# EAGLE board magnetolocator2 (EAGLE 9.5.2)
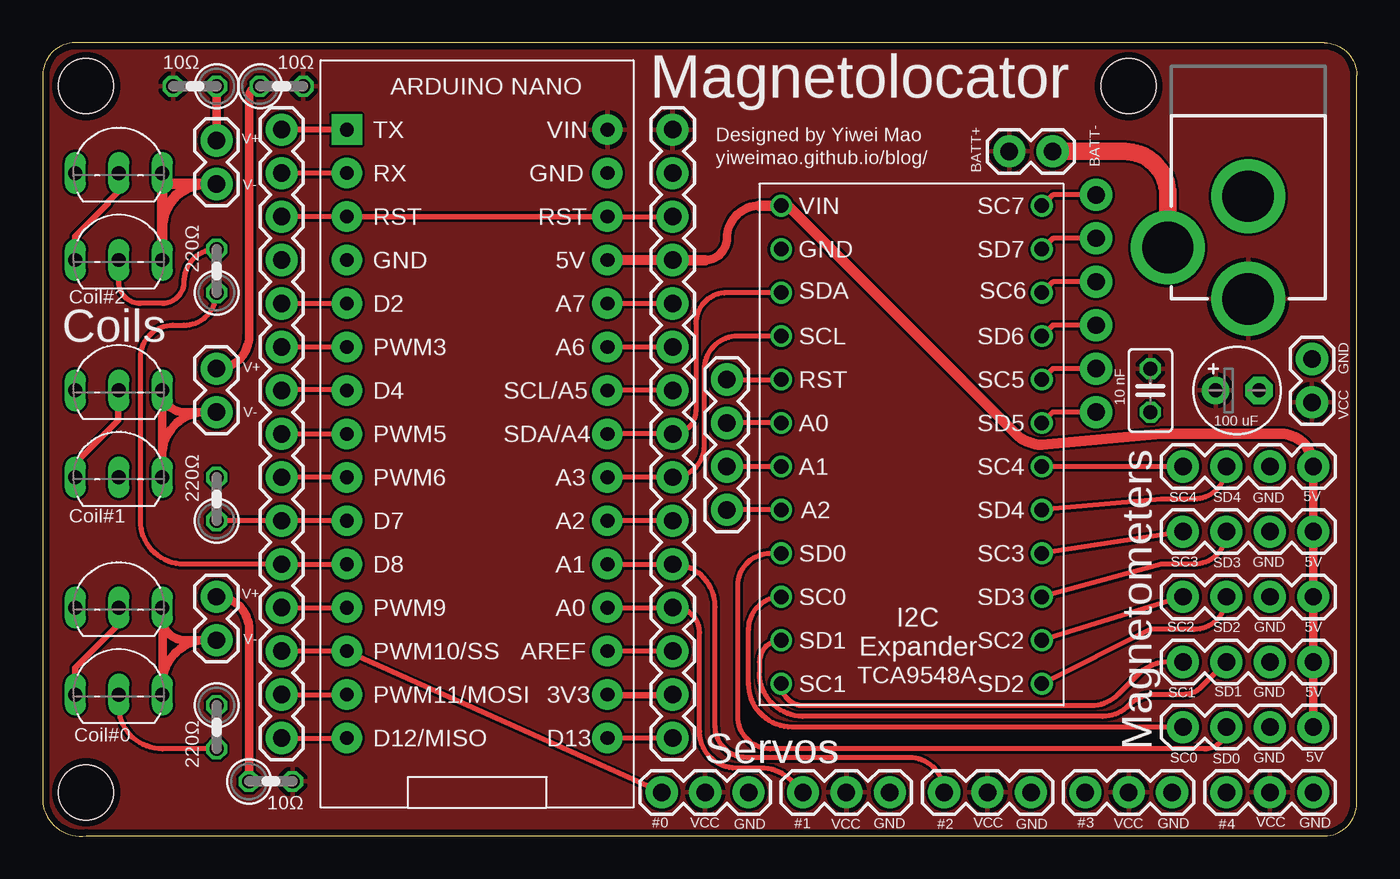
[diagram p0: board, top side]
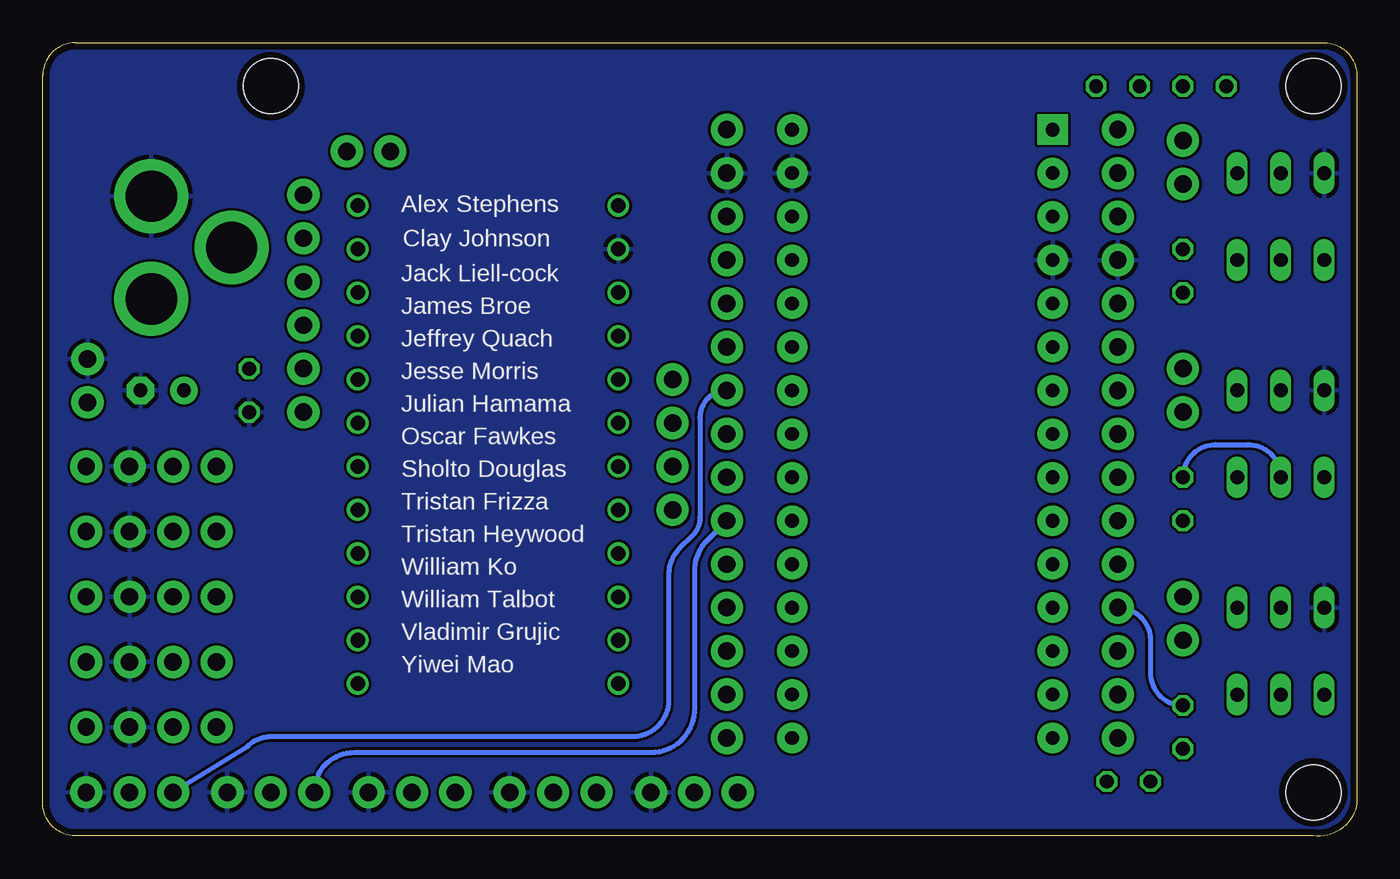
[diagram p1: board, bottom side, seen from below]

Size 76.83 x 46.38 mm. Coordinates in mm from the lower left corner, seen from the top.
Outline: 2.54,0.02 74.93,0.02 arc90 76.83,1.93 76.83,44.47 arc90 74.93,46.38 1.91,46.38 arc90 0,44.47 0,1.93 arc90 2.54,0.02
Copper layers (1*16): Top 0.035559375mm / dielectric 1.6mm / Bottom 0.035559375mm
Design rules "oshpark-2layer": minimum track width 6mil, minimum drill 10mil, track to track 6mil, track to pad 6mil, pad to pad 6mil, via to via 6mil, smd to smd 6mil, copper to edge 15mil, drill to drill 6mil, minimum pad ring 5mil, minimum via ring 5mil, stop-mask expansion 2.5mil, vias tented up to drill 0mil, thermal gap 10mil
Net classes: 1 coils: width 0.508 mm; 2 power: width 0.508 mm; 3 darlington: width 0.381 mm
Holes 3.2 mm at 2.54,2.56 63.5,43.84 2.54,43.84

## Footprints (pad centres in the part's own frame; a part is rotated, then mirrored left to right if it is on the bottom)
C025-025X050 = drill 0.813 octagon: 1 -1.27,0; 2 1.27,0
E2,5-5 = drill 0.813 pad 1.6: + -1.27,0 | drill 0.813 pad 1.6 octagon: - 1.27,0
1X04 = drill 1.016 pad 1.88: 1 0,0; 2 2.54,0; 3 5.08,0; 4 7.62,0
1X02 = drill 1.016 pad 1.88: 1 0,0; 2 2.54,0
POWER_JACK_PTH = drill 2.997 pad 4.318: GND 0,7.7; GNDBREAK 4.7,10.7; PWR 0,13.7
1X15 = drill 1.016 pad 1.88: 1 0,0; 2 2.54,0; 3 5.08,0; 4 7.62,0; 5 10.16,0; 6 12.7,0; 7 15.24,0; 8 17.78,0; 9 20.32,0; 10 22.86,0; 11 25.4,0; 12 27.94,0; 13 30.48,0; 14 33.02,0; 15 35.56,0
1X03 = drill 1.016 pad 1.88: 1 0,0; 2 2.54,0; 3 5.08,0
1X06_NO_SILK = drill 1.016 pad 1.88: 1 0,0; 2 2.54,0; 3 5.08,0; 4 7.62,0; 5 10.16,0; 6 12.7,0
0207/2V = drill 0.813 octagon: 1 -1.27,0; 2 1.27,0
TO92-EBC = drill 0.813 long: B 0,-1.27; C 2.54,-1.27; E -2.54,-1.27
BOARD_ARDUINO_NANO = drill 0.8 pad 1.778: 3V3 15.24,2.54; +5V 15.24,27.94; A0 15.24,7.62; A1 15.24,10.16; A2 15.24,12.7; A3 15.24,15.24; A4 15.24,17.78; A5 15.24,20.32; A6 15.24,22.86; A7 15.24,25.4; AREF 15.24,5.08; D0/RX 0,33.02; D2 0,25.4; D3 0,22.86; D4 0,20.32; D5 0,17.78; D6 0,15.24; D7 0,12.7; D8 0,10.16; D9 0,7.62; D10 0,5.08; D11 0,2.54; D12 0,0; D13 15.24,0; GND 0,27.94; GND1 15.24,33.02; RESET 0,30.48; RESET1 15.24,30.48; VIN 15.24,35.56 | drill 0.8 pad 1.778 square: D1/TX 0,35.56
TCA9548A = drill 0.85: GND 1.27,26.67; RST 1.27,19.05; S0 1.27,16.51; S1 1.27,13.97; S2 1.27,11.43; SCL 1.27,21.59; SCL0 1.27,6.35; SCL1 1.27,1.27; SCL2 16.51,3.81; SCL3 16.51,8.89; SCL4 16.51,13.97; SCL5 16.51,19.05; SCL6 16.51,24.13; SCL7 16.51,29.21; SDA 1.27,24.13; SDA0 1.27,8.89; SDA1 1.27,3.81; SDA2 16.51,1.27; SDA3 16.51,6.35; SDA4 16.51,11.43; SDA5 16.51,16.51; SDA6 16.51,21.59; SDA7 16.51,26.67; VIN 1.27,29.21

## Placement (x,y rotation side)
C1  [C025-025X050]  64.77,26.06 270 top
C2  [E2,5-5]  69.85,26.06 0 top
J1  [1X04]  66.67,13.99 0 top
J2  [1X04]  66.67,17.8 0 top
J3  [1X04]  66.67,21.61 0 top
J4  [1X04]  66.67,10.18 0 top
J5  [1X04]  66.67,6.37 0 top
J6  [1X02]  10.16,40.66 270 top
J7  [1X02]  10.16,13.99 270 top
J8  [1X02]  10.16,27.33 270 top
J9  [1X04]  40.01,19.07 90 top
J10  POWER_JACK  [POWER_JACK_PTH]  70.48,45.11 180 top
J11  [1X15]  13.97,41.3 270 top
J12  [1X15]  36.83,41.3 270 top
J13  servo0  [1X03]  74.3,2.56 180 top
J14  servo1  [1X03]  66.04,2.56 180 top
J15  servo2  [1X03]  57.78,2.56 180 top
J16  servo3  [1X03]  49.53,2.56 180 top
J17  servo4  [1X03]  41.27,2.56 180 top
J18  [1X02]  56.52,40.03 0 top
J19  [1X02]  74.22,27.89 270 top
J20  [1X06_NO_SILK]  61.59,37.49 270 top
R1  [0207/2V]  10.16,33.04 90 top
R2  [0207/2V]  10.16,19.71 90 top
R3  [0207/2V]  13.97,43.84 0 top
R4  [0207/2V]  8.89,43.84 180 top
R5  [0207/2V]  10.16,6.37 270 top
R6  [0207/2V]  13.34,3.2 0 top
T1  [TO92-EBC]  4.45,22.25 0 top
T2  [TO92-EBC]  4.45,40.03 0 top
T3  [TO92-EBC]  4.45,34.95 0 top
T4  [TO92-EBC]  4.45,27.33 0 top
T5  [TO92-EBC]  4.45,14.63 0 top
T6  [TO92-EBC]  4.45,9.55 0 top
U$1  BOARD_ARDUINO-NANO  [BOARD_ARDUINO_NANO]  17.78,5.74 0 top
U$2  TCA9548A  [TCA9548A]  41.91,7.64 0 top

## Library data of the parts
C1 C2 = rcl; SPICEPREFIX: C
J1-J5 J9 = SparkFun-Connectors; PROD_ID: CONN-09696
J6-J8 J11 J12 J18 J19 = SparkFun-Connectors
J10 = SparkFun-Connectors; PROD_ID: CONN-08197
J13-J17 = SparkFun-Connectors; PROD_ID: XXX-00000
J20 = SparkFun-Connectors; PROD_ID: CONN-08437
R1-R6 = rcl; SPICEPREFIX: R
T1-T6 = transistor-neu-to92
U$1 = nano_v3
U$2 = custom_component

## Nets
3V3 [darlington]: J12.14 U$1.3V3
5V [power]: J1.4 J2.4 J3.4 J4.4 J5.4 J12.4 U$1.+5V U$2.VIN
A0: J12.12 J16.3 U$1.A0
A1: J12.11 J15.3 U$1.A1
A2: J12.10 J14.3 U$1.A2
A3: J12.9 U$1.A3 U$2.SCL
A4: J12.8 U$1.A4 U$2.SDA
A5: J12.7 J13.3 U$1.A5
A6: J12.6 U$1.A6
A7: J12.5 U$1.A7
AREF: J12.13 U$1.AREF
D2: J11.5 U$1.D2
D3: J11.6 U$1.D3
D4: J11.7 U$1.D4
D5: J11.8 U$1.D5
D6: J11.9 U$1.D6
D7: J11.10 R2.1 U$1.D7
D8: J11.11 R1.1 U$1.D8
D9: J11.12 R5.1 U$1.D9
D10: J11.13 J17.3 U$1.D10
D11: J11.14 U$1.D11
D12: J11.15 U$1.D12
D13: J12.15 U$1.D13
GND: C1.2 C2.- J1.3 J2.3 J3.3 J4.3 J5.3 J10.GND J11.4 J12.2 J13.1 J14.1 J15.1 J16.1 J17.1 J19.1 T2.E T4.E T5.E U$1.GND U$1.GND1 U$2.GND
N$1: R2.2 T1.B
N$2: R1.2 T3.B
N$3: J3.1 U$2.SCL4
N$4: J3.2 U$2.SDA4
N$5 [coils]: J8.1 R3.1
N$6: J10.GNDBREAK J18.2
N$7 [darlington]: T1.E T4.B
N$8 [coils]: J8.2 T1.C T4.C
N$9: J2.1 U$2.SCL3
N$10: J2.2 U$2.SDA3
N$11 [coils]: J6.1 R4.1
N$12 [darlington]: T2.B T3.E
N$13: J1.1 U$2.SCL2
N$14: J1.2 U$2.SDA2
N$15 [coils]: J6.2 T2.C T3.C
N$16: R5.2 T6.B
N$17: J4.1 U$2.SCL1
N$18: J4.2 U$2.SDA1
N$19 [coils]: J7.1 R6.1
N$20 [darlington]: T5.B T6.E
N$21: J5.1 U$2.SCL0
N$22: J5.2 U$2.SDA0
N$23 [coils]: J7.2 T5.C T6.C
N$24: J9.1 U$2.S2
N$25: J9.2 U$2.S1
N$26: J9.3 U$2.S0
N$27: J9.4 U$2.RST
N$28: J20.1 U$2.SCL7
N$29: J20.2 U$2.SDA7
N$30: J20.3 U$2.SCL6
N$31: J20.4 U$2.SDA6
N$32: J20.5 U$2.SCL5
N$33: J20.6 U$2.SDA5
RST: J11.3 J12.3 U$1.RESET U$1.RESET1
RX: J11.2 U$1.D0/RX
TX: J11.1 U$1.D1/TX
VCC [power]: C1.1 C2.+ J10.PWR J12.1 J13.2 J14.2 J15.2 J16.2 J17.2 J18.1 J19.2 R3.2 R4.2 R6.2 U$1.VIN

## Tracks (layer width: path | path; a pad name or v marks a point on that pad's centre or on a via)
3V3
  Top 0.381: U$1.3V3 33.07,8.25 36.8,8.25 J12.14
5V
  Top 0.508: 33.07,33.7 U$1.+5V | J5.4 J4.4 J1.4 J2.4 J3.4 | 41.91,36.85 arc90 40.01,34.95 arc-90 38.73,33.68
  Top 0.61: J3.4 arc90 72.39,23.52 65.41,23.52 58.42,22.88 arc-45 56.9,23.51 43.66,36.75 U$2.VIN 41.91,36.85 | 38.73,33.68 J12.4 33.07,33.7
A0
  Top 0.305: U$1.A0 J12.12 36.96,13.36 arc-90 38.41,11.91 38.41,6.12 arc90 40.54,3.98 41.98,3.98 arc-45 43.77,3.24 J16.3
A1
  Top 0.152: U$1.A1 33.05,15.87 | 36.8,15.87 J12.11
  Top 0.305: 33.05,15.87 36.8,15.87 arc90 J12.11 arc-90 39.32,13.41 39.32,6.42 arc90 41.15,4.59 50.67,4.59 arc-90 J15.3
A2
  Top 0.152: U$1.A2 33.05,18.46 | 36.8,18.46 J12.10
  Top 0.305: U$1.A2 arc-90 33.05,18.46 36.8,18.46
  Bottom 0.305: J14.3 arc90 58.62,4.9 41.25,4.9 arc-90 38.71,7.44 38.71,15.5 arc45 37.97,17.3 J12.10
A3
  Top 0.305: U$1.A3 J12.9 arc90 38.67,22.81 38.67,27.26 arc-90 40.64,29.23 U$2.SCL
A4
  Top 0.305: U$2.SDA 40.01,31.77 arc90 38.19,29.95 38.19,24.87 arc-90 J12.8 U$1.A4
A5
  Top 0.152: U$1.A5 33.05,26.08 36.8,26.08 J12.7
  Top 0.305: J12.7 U$1.A5
  Bottom 0.305: J12.7 arc-90 38.41,24.48 38.41,18.61 arc45 38.84,17.57 39.62,16.78 arc-45 40.23,15.31 40.23,7.95 arc90 42.37,5.81 63.45,5.81 arc-45 64.92,5.2 J13.3
A6
  Top 0.305: U$1.A6 J12.6
A7
  Top 0.152: U$1.A7 33.05,31.11 36.8,31.11 J12.5
  Top 0.305: U$1.A7 36.78,31.14 arc-90 36.8,31.11
AREF
  Top 0.152: U$1.AREF 33.05,10.84 | 36.8,10.84 J12.13
  Top 0.305: U$1.AREF arc-90 33.05,10.84 36.8,10.84
D2
  Top 0.152: U$1.D2 17.75,31.11 14.02,31.11 J11.5
  Top 0.305: J11.5 17.73,31.14 arc-90 17.75,31.11
D3
  Top 0.305: J11.6 U$1.D3
D4
  Top 0.152: 17.75,26.08 U$1.D4 | 14.02,26.08 J11.7
  Top 0.305: U$1.D4 arc90 17.75,26.08 14.02,26.08
D5
  Top 0.152: U$1.D5 17.75,23.49 14.02,23.49 J11.8
  Top 0.305: J11.8 17.73,23.52 arc-90 17.75,23.49
D6
  Top 0.305: U$1.D6 J11.9
D7
  Top 0.152: R2.1 10.21,18.46 13.95,18.46 J11.10 14.02,18.46 17.75,18.46 U$1.D7
  Top 0.305: R2.1 arc-90 10.19,18.46 13.95,18.46 | J11.10 arc-90 13.99,18.46 17.75,18.46
D8
  Top 0.305: R1.1 arc-90 8.26,29.87 7.62,29.87 arc90 5.71,27.96 5.71,18.44 arc90 8.26,15.9 J11.11 U$1.D8
D9
  Top 0.305: J11.12 U$1.D9
  Bottom 0.305: J11.12 arc90 12.06,11.45 12.06,9.55 arc-90 R5.1
D10
  Top 0.152: 17.68,10.84 14.02,10.84 J11.13 | 17.75,10.84 U$1.D10
  Top 0.305: J11.13 arc-90 13.99,10.84 17.68,10.84 | 17.68,10.84 17.75,10.84 | J17.3 17.68,10.84
D11
  Top 0.152: 17.75,8.25 U$1.D11 | 14.02,8.25 J11.14
  Top 0.305: U$1.D11 arc-90 17.75,8.25 14.02,8.25
D12
  Top 0.305: J11.15 U$1.D12
D13
  Top 0.305: J12.15 U$1.D13
GND
  pour Bottom: 0.64,47.01 -0.64,45.74 -0.64,1.29 1.27,-0.61 76.2,-0.61 77.47,0.66 77.47,44.47 77.47,45.74 75.56,47.65 1.27,47.65
N$1
  Bottom 0.305: R2.2 arc90 8.26,22.88 6.35,22.88 arc90 T1.B
N$2
  Top 0.305: R1.2 arc90 8.26,32.41 arc-90 6.99,31.14 5.71,31.14 arc-90 4.45,32.41 T3.B
N$3
  Top 0.305: U$2.SCL4 J3.1
N$4
  Top 0.305: J3.2 arc-90 67.31,19.71 65.41,19.71 U$2.SDA4
N$5
  Top 0.508: R3.1 arc90 12.06,43.2 12.06,29.23 arc-90 J8.1
N$6
  Top 1.016: J18.2 63.24,40.03 arc-90 65.78,37.49 J10.GNDBREAK
N$7
  Top 0.381: T1.E 1.91,21.79 4.42,24.3 4.42,26 T4.B
N$8
  Top 0.508: 7.01,26 T4.C T1.C 6.99,22.25 arc-90 9.53,24.79 J8.2 8.23,24.79 arc-90 7.01,26
N$9
  Top 0.305: J2.1 U$2.SCL3
N$10
  Top 0.305: J2.2 arc-90 67.31,15.9 65.41,15.9 U$2.SDA3
N$11
  Top 0.508: R4.1 J6.1
N$12
  Top 0.381: T3.E 1.91,35.07 3.81,36.98 3.81,37.05 4.42,37.66 4.42,38.73 T2.B
N$13
  Top 0.305: J1.1 U$2.SCL2
N$14
  Top 0.305: J1.2 arc-90 67.31,12.09 64.77,12.09 U$2.SDA2
N$15
  Top 0.61: T2.C T3.C 6.99,35.58 arc-90 9.53,38.12 J6.2 7.62,38.12 arc-90 T2.C
N$16
  Top 0.305: R5.2 6.99,5.1 arc-90 4.45,7.64 T6.B
N$17
  Top 0.305: U$2.SCL1 arc90 44.45,7.64 61.33,7.64 arc45 62.87,8.28 64.03,9.44 arc-45 65.82,10.18 J4.1
N$18
  Top 0.305: U$2.SDA1 arc90 41.91,10.18 41.91,9.55 arc90 44.45,7.01 61.97,7.01 arc45 63.5,7.64 arc-45 65.03,8.28 66.67,8.28 arc45 67.76,8.72 J4.2
N$19
  Top 0.508: R6.1 12.06,12.09 arc90 J7.1
N$20
  Top 0.381: T6.E 1.91,9.85 4.42,12.36 4.42,13.36 T5.B
N$21
  Top 0.305: J5.1 43.81,6.37 arc-90 41.27,8.91 41.27,12.09 arc-90 U$2.SCL0
N$22
  Top 0.305: J5.2 arc-90 67.94,5.1 42.55,5.1 arc-90 40.64,7.01 40.64,14.63 arc-90 42.55,16.53 U$2.SDA0
N$23
  Top 0.508: 7.01,12.72 7.01,13.36 T5.C | 7.01,12.72 7.01,8.91 | T6.C 7.01,8.33 7.01,8.91 | 7.01,12.72 arc90 8.28,11.45 J7.2 9.55,11.45 arc90 7.01,8.91
N$24
  Top 0.305: U$2.S2 J9.1
N$25
  Top 0.305: J9.2 U$2.S1
N$26
  Top 0.305: U$2.S0 J9.3
N$27
  Top 0.305: J9.4 U$2.RST
N$28
  Top 0.305: J20.1 59.05,37.49 U$2.SCL7
N$29
  Top 0.305: J20.2 59.05,34.95 U$2.SDA7
N$30
  Top 0.305: J20.3 59.05,32.41 U$2.SCL6
N$31
  Top 0.305: J20.4 59.05,29.87 U$2.SDA6
N$32
  Top 0.305: J20.5 59.05,27.33 U$2.SCL5
N$33
  Top 0.305: J20.6 59.05,24.79 U$2.SDA5
RST
  Top 0.152: U$1.RESET 18.67,36.22 18.75,36.29 32.08,36.29 32.16,36.22 U$1.RESET1
  Top 0.305: J11.3 U$1.RESET U$1.RESET1 J12.3
RX
  Top 0.152: U$1.D0/RX 17.75,38.73 14.02,38.73 J11.2
  Top 0.305: U$1.D0/RX J11.2
TX
  Top 0.152: U$1.D1/TX 17.68,41.4 14.1,41.4 14.02,41.32 J11.1
  Top 0.305: J11.1 U$1.D1/TX
VCC
  pour Top: 0,46.38 -0.64,45.74 -0.64,0.66 0.64,-0.61 76.2,-0.61 77.47,0.66 77.47,44.47 77.47,45.74 76.2,47.01 0.64,47.01

## Text on the board
tPlace: 10Ω | 10Ω | Magnetolocator | Designed by Yiwei Mao | V+ | yiweimao.github.io/blog/ | BATT+ | BATT- | V- | 220Ω | Coil#2 | Coils | V+ | GND | 10 nF | 100 uF | V- | VCC | 220Ω | 5V | SC4 | SD4 | GND | Coil#1 | SC3 | SD3 | GND | 5V | V+ | SC2 | SD2 | GND | 5V | V- | SC1 | SD1 | GND | 5V | Coil#0 | Magnetometers | 220Ω | Servos | SC0 | SD0 | GND | 5V | 10Ω | #0 | VCC | GND | #1 | VCC | GND | #2 | VCC | GND | #3 | VCC | GND | #4 | VCC | GND
bPlace: Alex Stephens | Clay Johnson | Jack Liell-cock | James Broe | Jeffrey Quach | Jesse Morris | Julian Hamama | Oscar Fawkes | Sholto Douglas | Tristan Frizza | Tristan Heywood | William Ko | William Talbot | Vladimir Grujic | Yiwei Mao